# Altium PCB USB_TypeC_Footprint.pcbdoc
Units mil, origin at the board's own origin, x right, y up, seen from the top; angles counter-clockwise.
Board outline 1413.39 x 1499.47 mil, 2 copper layers (Top Layer, Bottom Layer); 1 components, 0 nets, 30 pads, 0 vias.
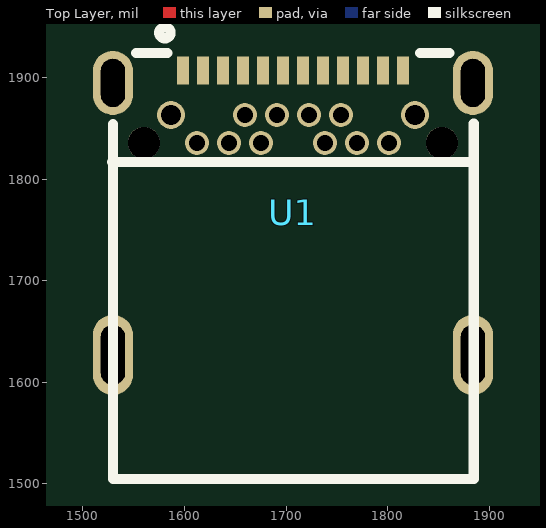
[diagram p0: Top Layer view]
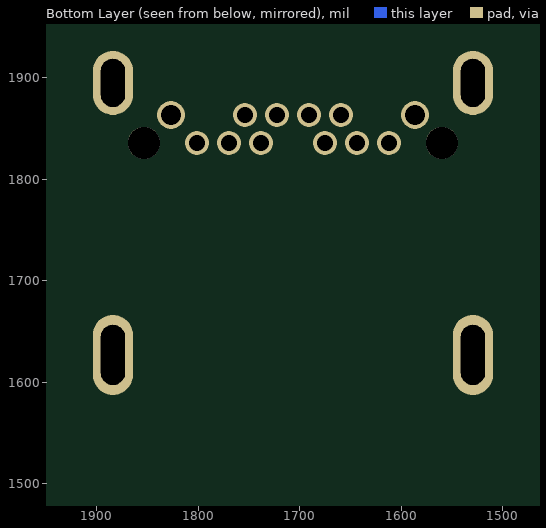
[diagram p1: Bottom Layer view, seen from below]

## Layer stack, top to bottom
Top Solder: solder mask 0.4, Solder Resist, Dk 3.5
Top Layer: signal copper 1.4
Dielectric1: dielectric 12.6, FR-4, Dk 4.8
Bottom Layer: signal copper 1.4
Bottom Solder: solder mask 0.4, Solder Resist, Dk 3.5

## Board outline
2413.39,1000 1000,1000 1000,2499.47 2413.39,2499.47

## Design rules (kind name [scope] priority, off if disabled: settings)
Clearance [All] p1: gap=10 ignorepadtopadclearanceinfootprint=FALSE except(0: Arc-Hole Track-Hole SMDPad-Hole THPad-Hole Via-Hole Fill-Hole Poly-Hole Region-Hole Text-Hole)
PolygonConnect [All] p1: connectstyle=Relief reliefconductorwidth=10 reliefentries=4 polygonreliefangle="90 Angle" airgapwidth=10
RoutingVias [All] p1: holewidth=28 width=50 viastyle="Through Hole" minholewidth=28 minwidth=50 maxholewidth=28 maxwidth=50
SolderMaskExpansion [All] p1: expansion=4 istentingtop=FALSE
Width [All] p1: maxlimit=10 minlimit=10 preferedwidth=10
30 further rules are at their usual default settings.

## Components (designator, comment, footprint, x,y, rotation, side; value= is the part's Value field where it differs from the comment)
U1 "TYPE-C-TH_USB31-TYPEC-33141-2FS" TYPE-C-TH_USB31-TYPEC-33141-2FS 1706.7,1767.01 r0 top

## Footprints (in the part's own frame and the unit in brackets; to place one, negate y for a bottom-side part, rotate by r counter-clockwise, add the part's x,y. Pads: shape width x height; smd on the part's side, far side on the other; paste and mask are expansions set on the pad)
TYPE-C-TH_USB31-TYPEC-33141-2FS [mm]
  rect 0.3x0.7 smd: A1(-2.75,3.555) A2(-2.25,3.555) A3(-1.75,3.555) A4(-1.25,3.555) A5(-0.75,3.555) A6(-0.25,3.555) A7(0.25,3.555) A8(0.75,3.555) A9(1.25,3.555) A10(1.75,3.555) A11(2.25,3.555) A12(2.75,3.555)
  round 0.7 hole 0.5: B1(3.05,2.445) B12(-3.05,2.445)
  round 0.6 hole 0.4: B2(2.4,1.745) B3(1.6,1.745) B4(1.2,2.445) B5(0.8,1.745) B6(0.4,2.445) B7(-0.4,2.445) B8(-0.8,1.745) B9(-1.2,2.445) B10(-1.6,1.745) B11(-2.4,1.745)
  oval 1x2 hole 0.6 slot 1.5 at 90 deg: EH(-4.5,-3.555) EH(4.5,-3.555)
  oval 1x1.6 hole 0.6 slot 1.2 at 90 deg: EH(-4.5,3.245) EH(4.5,3.245)
  round 0.8 hole 0.8 unplated: ""(-3.725,1.745) ""(3.725,1.745)
  silkscreen extent -4.52,-6.65 4.52,4.64

## Nets (pads, with @x,y where several pads share a name; then routed paths per layer and width w, separated by ;. In a path a pad name is that pad's centre, name@x,y a point inside that pad or via, vN(x,y) a via of type N, cw(c..) or ccw(c..) an arc to the next point about the centre after c; other vN are vias at no path point)
pads on no net: U1. U1.A1 U1.A2 U1.A3 U1.A4 U1.A5 U1.A6 U1.A7 U1.A8 U1.A9 U1.A10 U1.A11 U1.A12 U1.B1 U1.B2 U1.B3 U1.B4 U1.B5 U1.B6 U1.B7 U1.B8 U1.B9 U1.B10 U1.B11 U1.B12 U1.EH